# Altium PCB msxbreakout_fat.PcbDoc
Units mil, origin at the board's own origin, x right, y up, seen from the top; angles counter-clockwise.
Board outline 2561 x 2351 mil, 2 copper layers (Top Layer, Bottom Layer), stack 65.74 mil thick; 83 components, 142 nets, 380 pads, 236 vias.
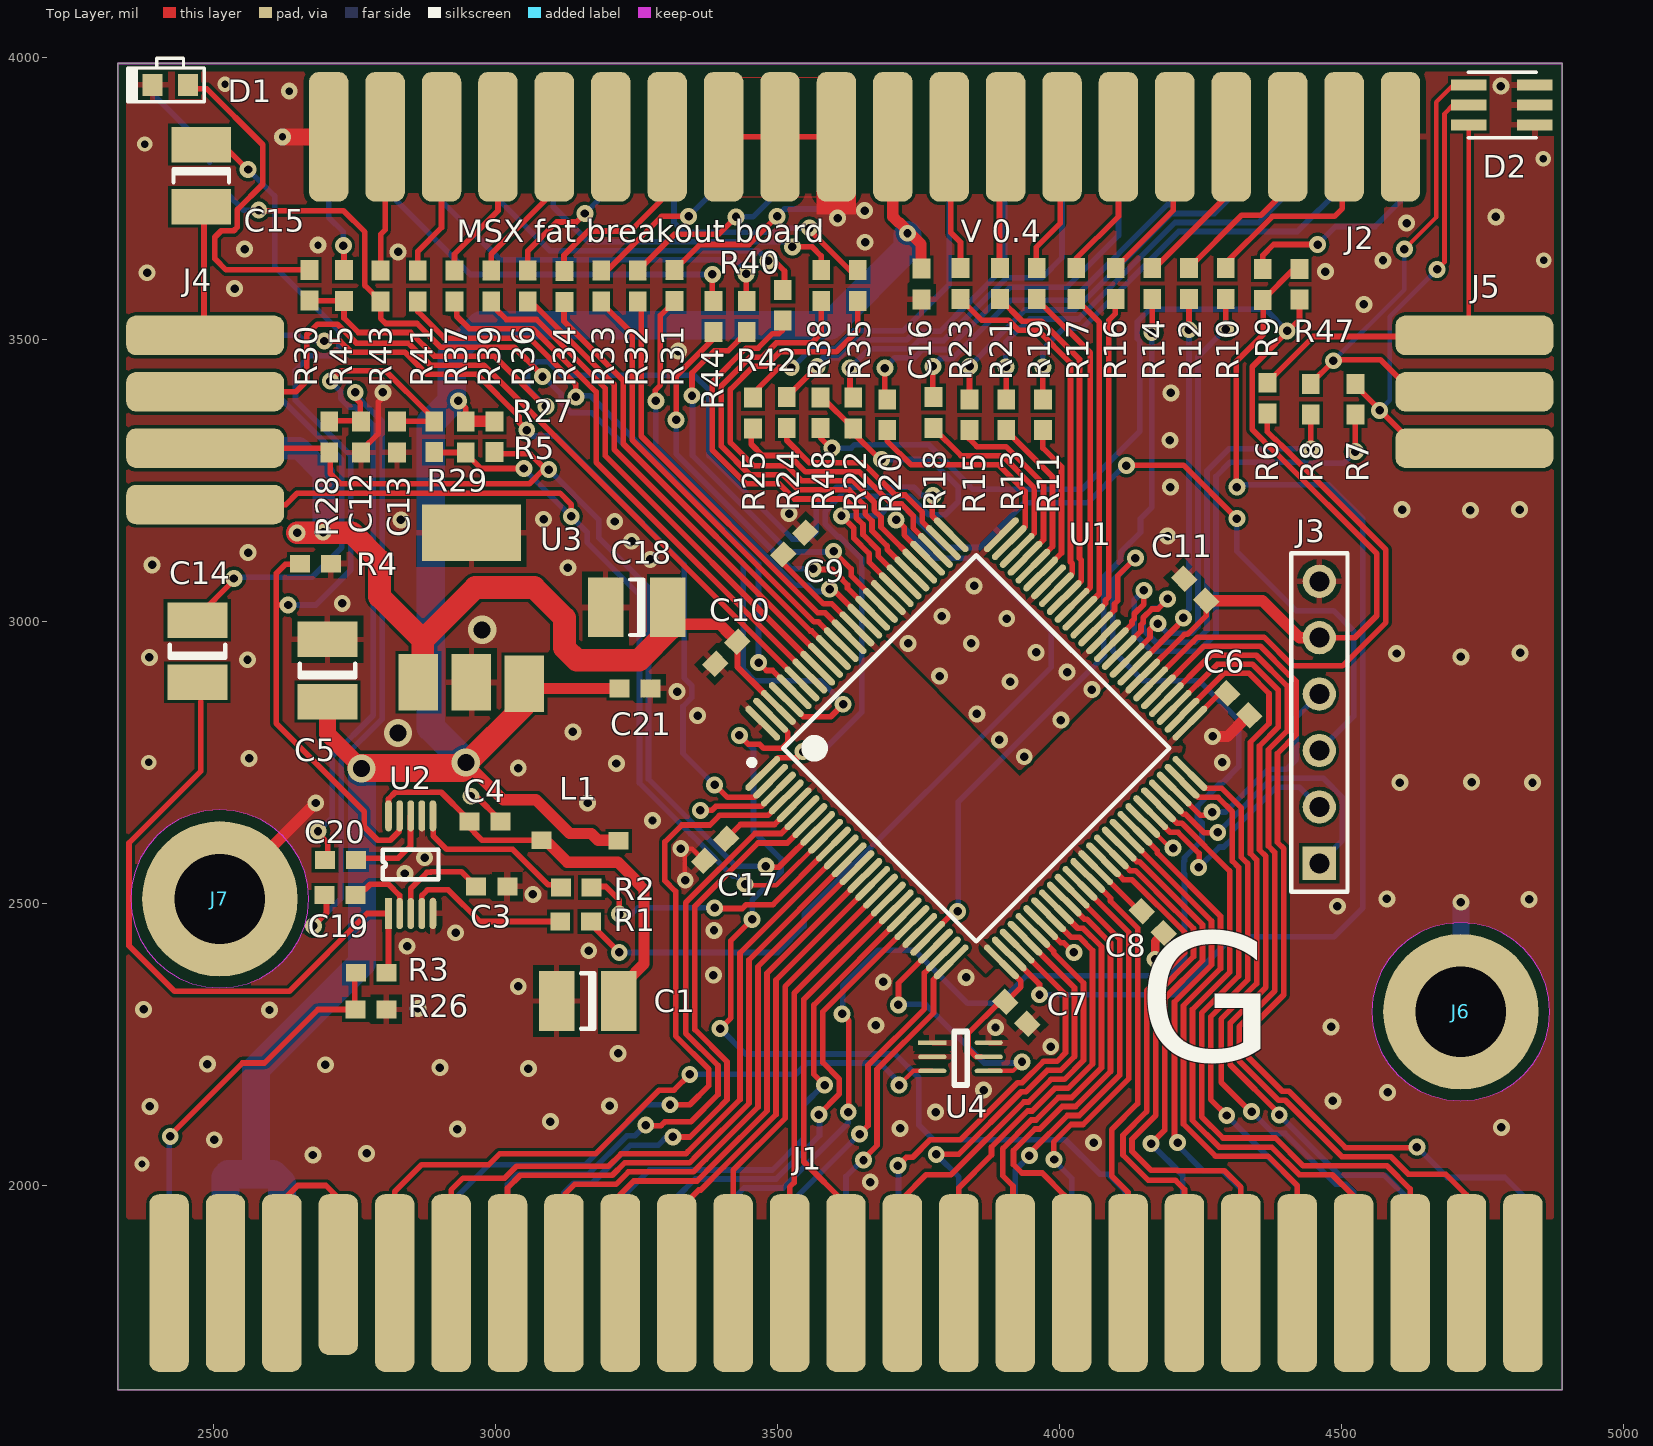
[diagram p0: Top Layer view]
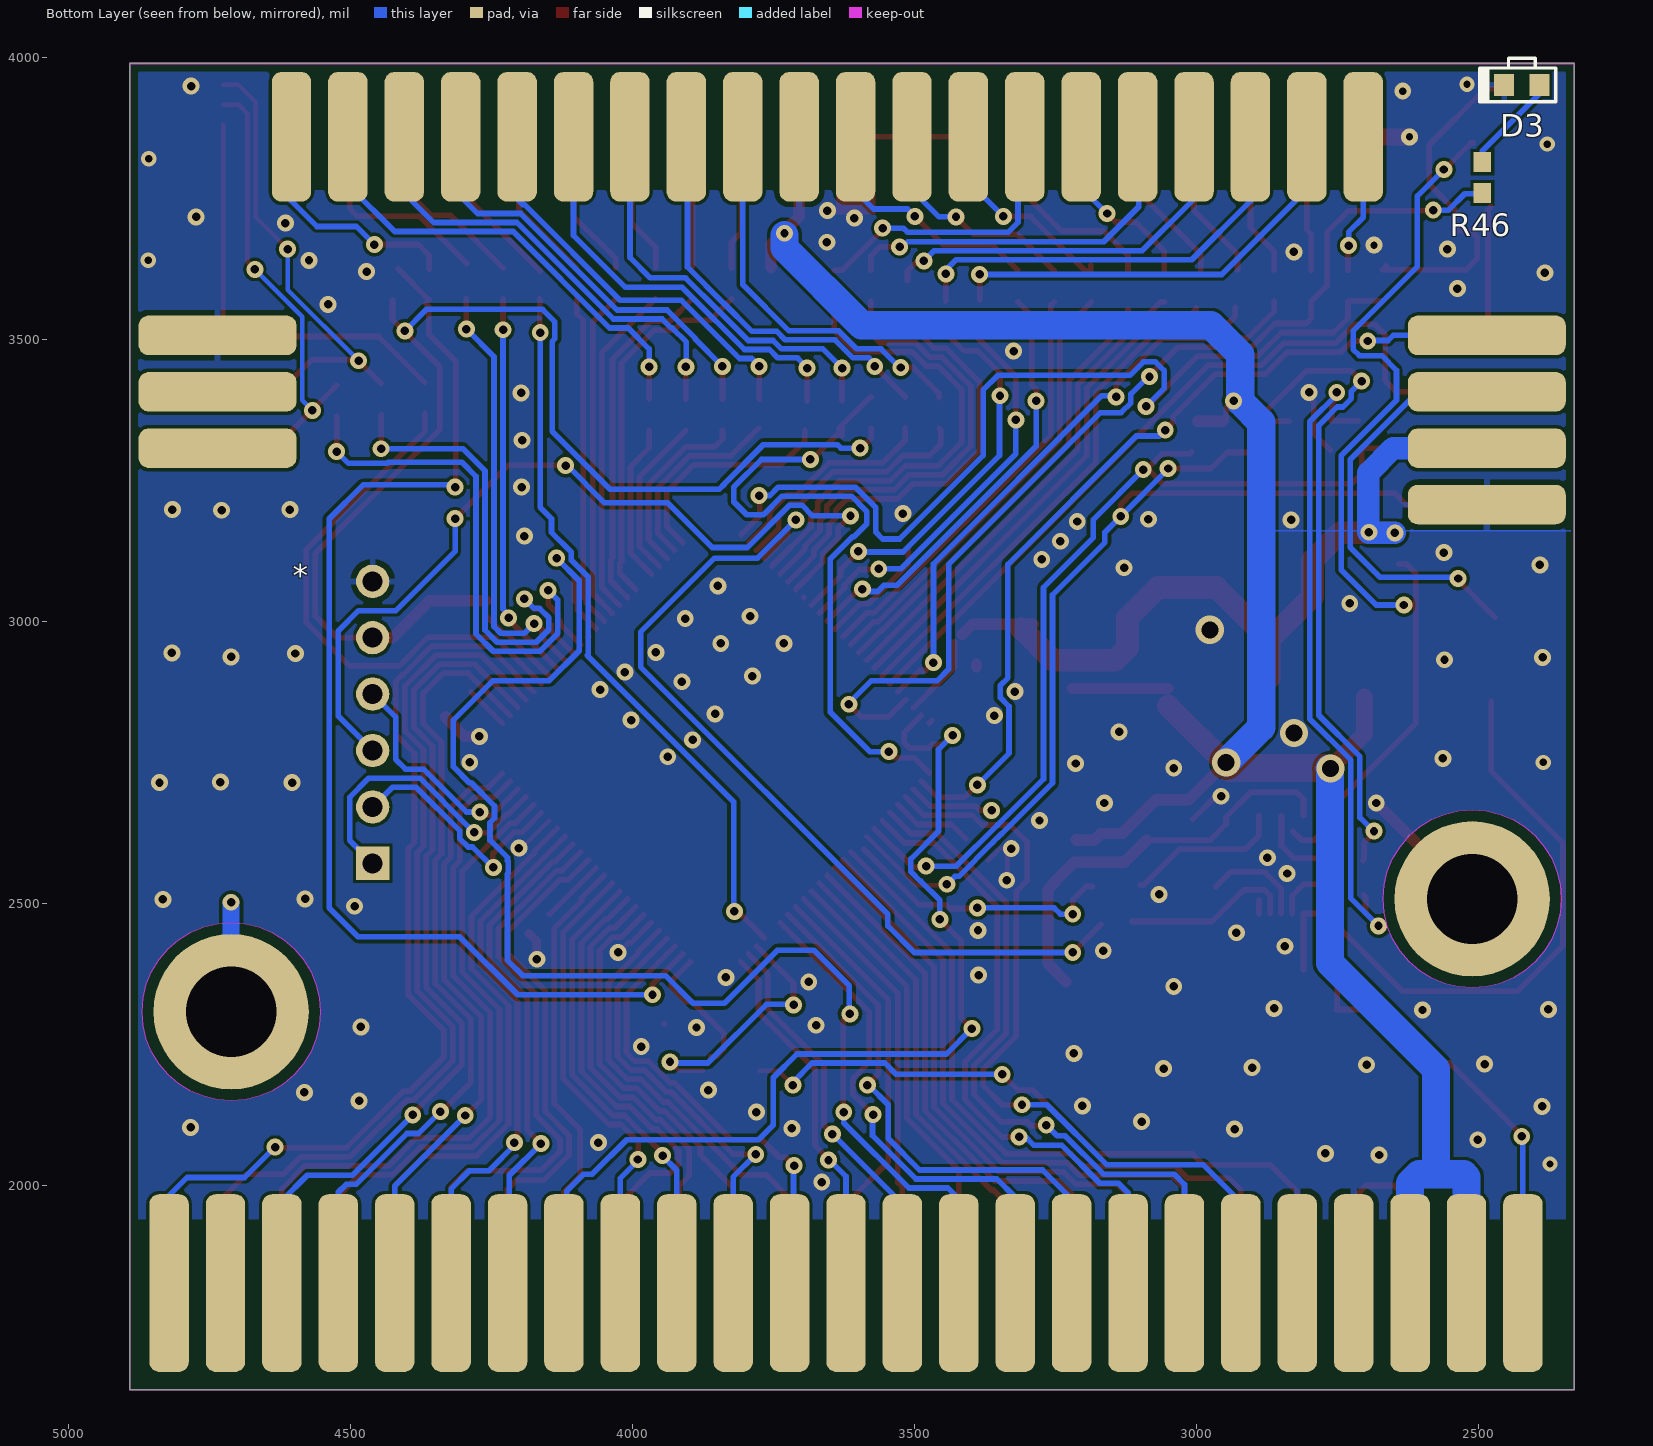
[diagram p1: Bottom Layer view, seen from below]
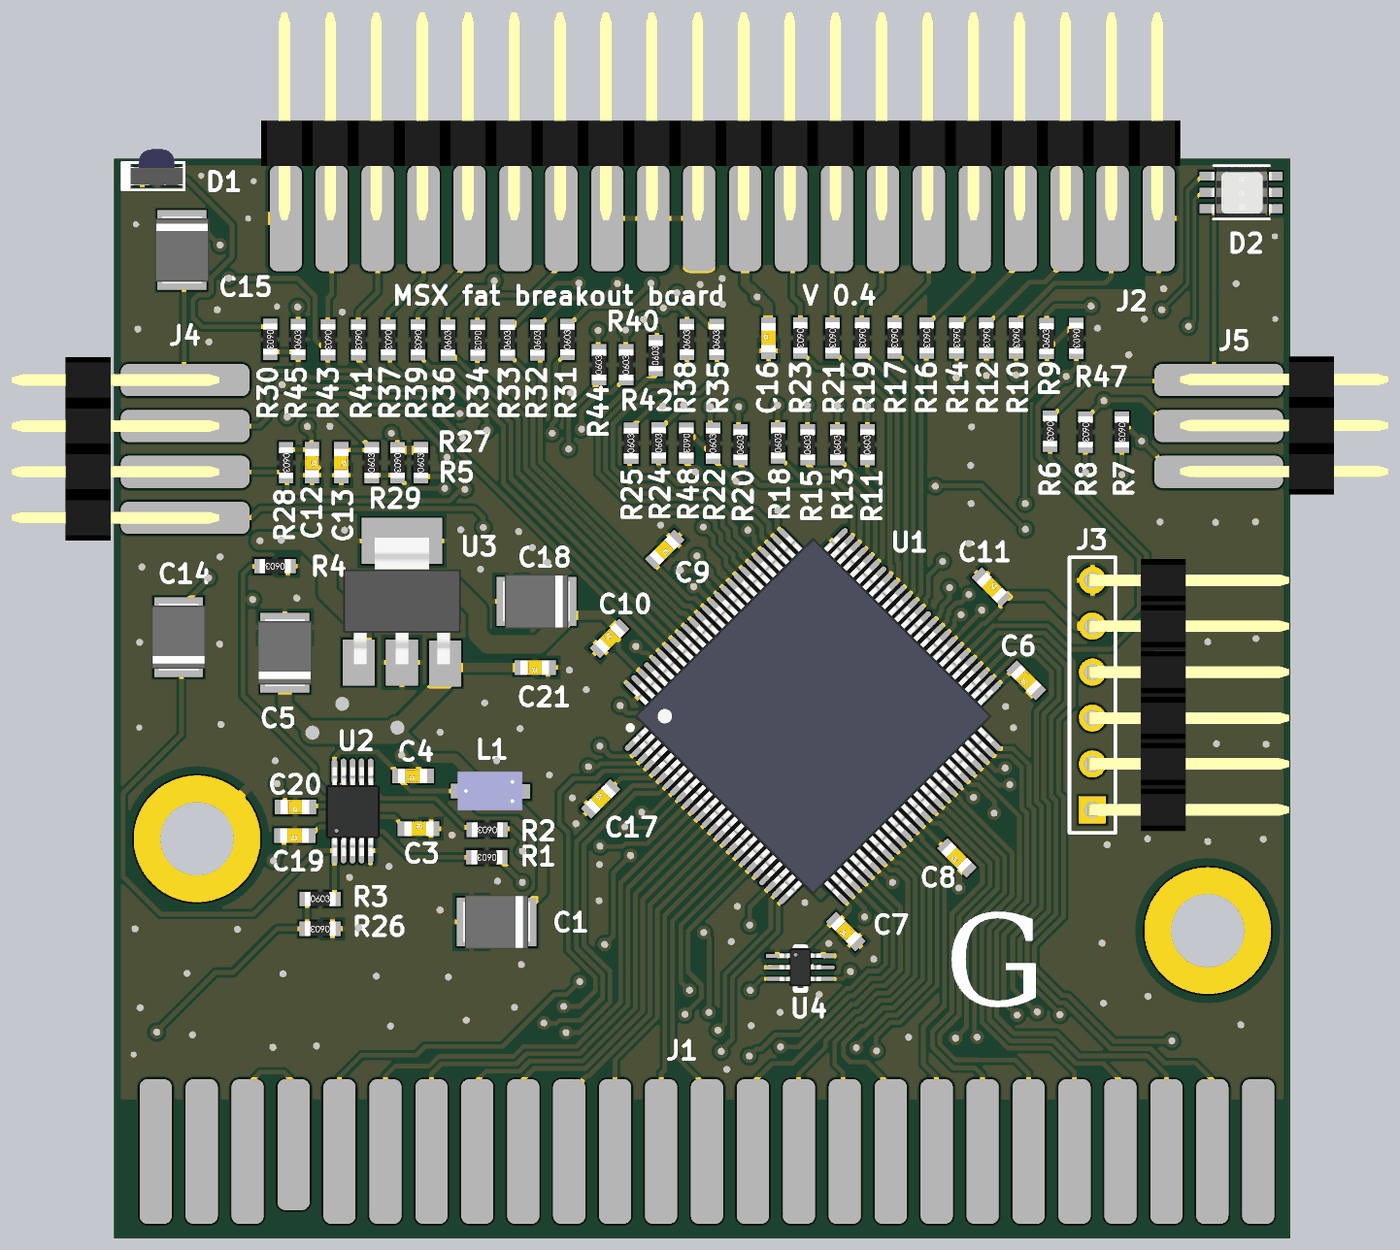
[diagram p2: 3D render of the assembled board from above, using the file's embedded part models]

## Layer stack, top to bottom
Top Solder: solder mask 0.4, Solder Resist, Dk 3.5
Top Layer: signal copper 1.37
Dielectric1: core 63, FR-4, Dk 4.2
Bottom Layer: signal copper 1.37
Bottom Solder: solder mask 0.4, Solder Resist, Dk 3.5

## Board outline
2331,1638 2331,3989 4892,3989 4892,1638

## Design rules (kind name [scope] priority, off if disabled: settings)
Clearance [All] p1: gap=6
HoleSize [All] p1: absolutevalues=TRUE maxlimit=200 minlimit=13 maxpercent=80.000 minpercent=20.000
MinimumAnnularRing [All] p1: minimumring=7
MinimumSolderMaskSliver [All] p1: minsoldermaskwidth=3
PlaneClearance [All] p1: clearance=8
PolygonConnect PolygonConnect_Pad [(InPadClass('All Pads'))] p1: connectstyle=Relief reliefconductorwidth=10 reliefentries=4 polygonreliefangle="90 Angle" airgapwidth=10
PolygonConnect [All] p2: connectstyle=Direct reliefconductorwidth=10 reliefentries=4 polygonreliefangle="90 Angle" airgapwidth=10
RoomDefinition msxbreakout_fat [InComponentClass('msxbreakout_fat')] p1: confinementstyle=ConfineIn formatcopy=TRUE lockcomponents=FALSE outline 2094,4326.29 2094,1621.47 2097.53,1618 5117,1618 5117,4333.22 5111.12,4339
RoutingVias [All] p1: holewidth=15 width=30 viastyle="Through Hole" minholewidth=13 minwidth=30 maxholewidth=50 maxwidth=50
SilkToSilkClearance [All] p1: silktosilkclearance=6
SilkToSolderMaskClearance SilkscreenOverComponentPads [IsPad] p1: minsilkscreentomaskgap=6 clearancetoexposedcopper=TRUE
SolderMaskExpansion [All] p1: expansion=4
UnpouredPolygon [All] p1: allowunpoured=FALSE
Width [All] p1: maxlimit=50 minlimit=8 preferedwidth=10
24 further rules are at their usual default settings.

## Components (designator, comment, footprint, x,y, rotation, side; value= is the part's Value field where it differs from the comment)
C1 "Cap Pol1" cap1210POL 3164,2327 r180 top
C3 "Cap" cap0603 2994,2530 r0 top
C4 "Cap" cap0603 2982,2645 r180 top
C5 "Cap Pol1" cap1210POL 2703,2913 r90 top
C6 "Cap" cap0603 4317,2853 r135 top
C7 "Cap" cap0603 3924,2306 r135 top
C8 "Cap" cap0603 4166,2467 r135 top
C9 "Cap" cap0603 3530,3138 r225 top
C10 "Cap" cap0603 3410,2944 r45 top
C11 "Cap" cap0603 4241,3056 r315 top
C12 "Cap" cap0603 2762,3327 r270 top
C13 "Cap" cap0603 2826,3327 r270 top
C14 "Cap Pol1" cap1210POL 2472,2947 r90 top
C15 "Cap Pol1" cap1210POL 2479,3790 r270 top
C16 "Cap" cap0603 3756,3598 r90 top
C17 "Cap" cap0603 3390,2595 r45 top
C18 "Cap Pol1" cap1210POL 3251,3025 r180 top
C19 "Cap" cap0603 2725,2515 r180 top
C20 "Cap" cap0603 2726,2577 r180 top
C21 "Cap" cap0603 3248,2881 r180 top
D1 "APA1606SURCK" LED-0603_LAMP_BLUE 2424,3951 r180 top
D2 "ASMT-YTC2-0AA02" ASMT-YTC2-0AA02 4843,3951 r0 top
D3 "APA1606SURCK" LED-0603_LAMP_RED 2424,3951 r0 bottom
J1 "msxcart" msxcart 2422,1777 r0 top
J2 "Header 20X2" HDR2X20_90 4605,3859 r180 top
J3 "Header 1X6" HDR1X6_90 4461,2571 r90 top
J4 "Header 10X2" HDR2X4_90 2486,3507 r270 top
J5 "Header 10X2" HDR2X3_90 4736,3307 r90 top
J6 "MountHole" MOUNTHOLE 4712,2308 r0 top
J7 "MountHole" MOUNTHOLE 2512,2508 r0 top
L1 "Inductor" ind1206 3150,2612 r0 top
R1 "Res1" res0603 3143,2468 r180 top
R2 "Res1" res0603 3144,2528 r180 top
R3 "Res1" res0603 2780,2377 r0 top
R4 "Res1" res0603 2682,3102 r180 top
R5 "Res1" res0603 2999,3327 r90 top
R6 "Res1" res0603 4369,3396 r270 top
R7 "Res1" res0603 4525,3394 r270 top
R8 "Res1" res0603 4446,3394 r270 top
R9 "Res1" res0603 4361,3597 r90 top
R10 "Res1" res0603 4295,3599 r270 top
R11 "Res1" res0603 3971,3366 r90 top
R12 "Res1" res0603 4230,3599 r270 top
R13 "Res1" res0603 3906,3366 r90 top
R14 "Res1" res0603 4165,3599 r270 top
R15 "Res1" res0603 3841,3366 r90 top
R16 "Res1" res0603 4100,3599 r270 top
R17 "Res1" res0603 4030,3599 r270 top
R18 "Res1" res0603 3777,3370 r90 top
R19 "Res1" res0603 3960,3599 r270 top
R20 "Res1" res0603 3695,3366 r90 top
R21 "Res1" res0603 3895,3599 r270 top
R22 "Res1" res0603 3635,3369 r90 top
R23 "Res1" res0603 3825,3599 r270 top
R24 "Res1" res0603 3517,3370 r90 top
R25 "Res1" res0603 3457,3369 r90 top
R26 "Res1" res0603 2780,2312 r180 top
R27 "Resistor" res0603 2948,3327 r270 top
R28 "Res1" res0603 2706,3327 r270 top
R29 "Resistor" res0603 2892,3327 r90 top
R30 "Res1" res0603 2671,3596 r270 top
R31 "Res1" res0603 3318,3595 r90 top
R32 "Res1" res0603 3253,3594 r90 top
R33 "Res1" res0603 3188,3594 r90 top
R34 "Res1" res0603 3123,3594 r270 top
R35 "Res1" res0603 3643,3595 r90 top
R36 "Res1" res0603 3058,3594 r90 top
R37 "Res1" res0603 2928,3595 r270 top
R38 "Res1" res0603 3578,3595 r90 top
R39 "Res1" res0603 2993,3595 r270 top
R40 "Res1" res0603 3510,3560 r90 top
R41 "Res1" res0603 2863,3595 r270 top
R42 "Res1" res0603 3446,3540 r90 top
R43 "Res1" res0603 2797,3595 r270 top
R44 "Res1" res0603 3387,3540 r90 top
R45 "Res1" res0603 2732,3595 r90 top
R46 "Res1" res0603 2494,3787 r270 bottom
R47 "Res1" res0603 4426,3598 r270 top
R48 "Res1" res0603 3577,3370 r270 top
U1 "XC95144XL-7TQ100C" TQ100_M 3853,2775 r45 top
U2 "LM4811MM" LM4811MM 2811,2482 r90 top
U3 "Regulator 3V3" sot223_4 2958,2892 r180 top
U4 "74LVC1G57" "SOT-363 PKG" 3550,2313 r0 top

## Footprints (in the part's own frame and the unit in brackets; to place one, negate y for a bottom-side part, rotate by r counter-clockwise, add the part's x,y. Pads: shape width x height; smd on the part's side, far side on the other; paste and mask are expansions set on the pad)
ASMT-YTC2-0AA02 [mm] "LED HIGH BRIGHTNESS RGB 6PLCC"
  rect 1.6x0.5 smd: 1(0,-1.8) 2(0,-0.9) 3(0,0) 4(-2.975,0) 5(-2.975,-0.9) 6(-2.975,-1.8)
  silkscreen extent -3,-2.37 0.08,0.58, body extent -3.15,-2.3 0.25,0.5, height 1.81
cap0603 [mm] "Capacitor 0603"
  rect 0.9x0.8 smd: 1(-0.7,0) 2(0.7,0)
  body extent -0.78,-0.4 0.83,0.4, height 0.3
cap1210POL [mm] "Mixxeo"
  rect 1.6x2.7 smd: 1(-1.4,0) 2(1.4,0)
  silkscreen extent -0.3,-1.25 0.3,1.25, body extent -1.85,-1.5 1.85,1.5, height 1.2
HDR1X6_90 [mm] "Connector; Header; 6 Position"
  rect 1.5x1.5 hole 0.9: 1(0,0)
  round 1.5 hole 0.9: 2(2.54,0) 3(5.08,0) 4(7.62,0) 5(10.16,0) 6(12.7,0)
  silkscreen extent -1.27,-1.27 13.97,1.27, body extent -1.17,-10.89 13.87,0.25, height 2.27
HDR2X3_90 [mil]
  rrect50% 70x280 smd far side: 1(200,0) 3(100,0) 5(0,0)
  rrect50% 70x280 smd: 2(200,0) 4(100,0) 6(0,0)
  body extent -49,-369 251,84, height 66
HDR2X4_90 [mil] "HDR2X4_90"
  rrect50% 70x280 smd far side: 1(300,0) 3(200,0) 5(100,0) 7(0,0)
  rrect50% 70x280 smd: 2(300,0) 4(200,0) 6(100,0) 8(0,0)
  body extent -50,-378 350,75, height 66
HDR2X20_90 [mil]
  rrect50% 70x230 smd far side: 1(0,0) 3(100,0) 5(200,0) 7(300,0) 9(400,0) 11(500,0) 13(600,0) 15(700,0) 17(800,0) 19(900,0) 21(1000,0) 23(1100,0) 25(1200,0) 27(1300,0) 29(1400,0) 31(1500,0) 33(1600,0) 35(1700,0) 37(1800,0) 39(1900,0)
  rrect50% 70x230 smd: 2(0,0) 4(100,0) 6(200,0) 8(300,0) 10(400,0) 12(500,0) 14(600,0) 16(700,0) 18(800,0) 20(900,0) 22(1000,0) 24(1100,0) 26(1200,0) 28(1300,0) 30(1400,0) 32(1500,0) 34(1600,0) 36(1700,0) 38(1800,0) 40(1900,0)
  body extent -47,-449 1953,4, height 66
ind1206 [mm]
  rect 0.9x0.8 smd: 1(-1.727,0) 2(1.753,-0.025)
  body extent -1.78,-1.08 1.78,1.08, height 1.51
LED-0603_LAMP_BLUE [mm]
  rect 0.9x1 smd: 1(-0.8,0) 2(0.8,0)
  silkscreen extent -1.52,-1.2 1.91,0.76, body extent -1.5,-1.5 1.5,0.5, height 1
LED-0603_LAMP_RED [mm]
  rect 0.9x1 smd: 1(-0.8,0) 2(0.8,0)
  silkscreen extent -1.52,-1.2 1.91,0.76, body extent -1.5,-1.5 1.5,0.5, height 1
LM4811MM [mm]
  rect 1.4x0.3 smd: 1(0,0)
  oval 1.4x0.3 smd: 2(0,-0.5) 3(0,-1) 4(0,-1.5) 5(0,-2) 6(4.4,-2) 7(4.4,-1.5) 8(4.4,-1) 9(4.4,-0.5) 10(4.4,0)
  silkscreen extent 1.53,-2.25 2.87,0.25, body extent -0.29,-2.52 4.61,0.48, height 1.15
MOUNTHOLE [mm]
  round 7 hole 4.064: 1(0,0)
  Keep-Out Layer pour cut-out: 4.012,0 3.963,0.628 3.816,1.24 3.575,1.822 3.246,2.358 2.837,2.837 2.358,3.246 1.822,3.575 1.24,3.816 0.628,3.963 0,4.012 -0.628,3.963 -1.24,3.816 -1.822,3.575 -2.358,3.246 -2.837,2.837 -3.246,2.358 -3.575,1.822 -3.816,1.24 -3.963,0.628 -4.012,0 -3.963,-0.628 -3.816,-1.24 -3.575,-1.822 -3.246,-2.358 -2.837,-2.837 -2.358,-3.246 -1.822,-3.575 -1.24,-3.816 -0.628,-3.963 0,-4.012 0.628,-3.963 1.24,-3.816 1.822,-3.575 2.358,-3.246 2.837,-2.837 3.246,-2.358 3.575,-1.822 3.816,-1.24 3.963,-0.628 4.012,0
msxcart [mil] "MSX cartridge"
  rrect50% 70x314.96 smd far side: 1(2400,50) 3(2300,50) 5(2200,50) 7(2100,50) 9(2000,50) 11(1900,50) 13(1800,50) 15(1700,50) 17(1600,50) 19(1500,50) 21(1400,50) 23(1300,50) 25(1200,50) 27(1100,50) 29(1000,50) 31(900,50) 33(800,50) 35(700,50) 37(600,50) 39(500,50) 41(400,50) 43(300,50) 45(200,50) 47(100,50) 49(0,50)
  rrect50% 70x314.96 smd: 2(2400,50) 4(2300,50) 6(2200,50) 8(2100,50) 10(2000,50) 12(1900,50) 14(1800,50) 16(1700,50) 18(1600,50) 20(1500,50) 22(1400,50) 24(1300,50) 26(1200,50) 28(1100,50) 30(1000,50) 32(900,50) 34(800,50) 36(700,50) 38(600,50) 40(500,50) 42(400,50) 46(200,50) 48(100,50) 50(0,50)
  rrect50% 70x285 smd: 44(300,65)
res0603 [mm]
  rect 0.9x0.8 smd: 1(-0.686,0) 2(0.7,0)
  body extent -0.85,-0.4 0.85,0.4, height 0.56
sot223_4 [mil]
  rect 70x100 smd: 1(-94,2.32) 2(0,0) 3(94,0)
  rect 175x100 smd: 2(0,-264.76)
  body extent -128,-272 128,4, height 65
"SOT-363 PKG" [mil]
  rect 50x8 smd: 1(225,-60)
  oval 50x8 smd: 2(225,-85) 3(225,-110) 4(325,-110) 5(325,-85) 6(325,-60)
  silkscreen extent 264,-135 287,-40, body extent 230,-126 320,-44, height 39
TQ100_M [mm] "100-Pin Thin Quad Flat Pack (TQ100), IPC Low Density"
  oval 2.1x0.3 smd: 1(-7.6,6) 2(-7.6,5.5) 3(-7.6,5) 4(-7.6,4.5) 5(-7.6,4) 6(-7.6,3.5) 7(-7.6,3) 8(-7.6,2.5) 9(-7.6,2) 10(-7.6,1.5) 11(-7.6,1) 12(-7.6,0.5) 13(-7.6,0) 14(-7.6,-0.5) 15(-7.6,-1) 16(-7.6,-1.5) 17(-7.6,-2) 18(-7.6,-2.5) 19(-7.6,-3) 20(-7.6,-3.5) 21(-7.6,-4) 22(-7.6,-4.5) 23(-7.6,-5) 24(-7.6,-5.5) 25(-7.6,-6) 51(7.6,-6) 52(7.6,-5.5) 53(7.6,-5) 54(7.6,-4.5) 55(7.6,-4) 56(7.6,-3.5) 57(7.6,-3) 58(7.6,-2.5) 59(7.6,-2) 60(7.6,-1.5) 61(7.6,-1) 62(7.6,-0.5) 63(7.6,0) 64(7.6,0.5) 65(7.6,1) 66(7.6,1.5) 67(7.6,2) 68(7.6,2.5) 69(7.6,3) 70(7.6,3.5) 71(7.6,4) 72(7.6,4.5) 73(7.6,5) 74(7.6,5.5) 75(7.6,6)
  oval 0.3x2.1 smd: 26(-6,-7.6) 27(-5.5,-7.6) 28(-5,-7.6) 29(-4.5,-7.6) 30(-4,-7.6) 31(-3.5,-7.6) 32(-3,-7.6) 33(-2.5,-7.6) 34(-2,-7.6) 35(-1.5,-7.6) 36(-1,-7.6) 37(-0.5,-7.6) 38(0,-7.6) 39(0.5,-7.6) 40(1,-7.6) 41(1.5,-7.6) 42(2,-7.6) 43(2.5,-7.6) 44(3,-7.6) 45(3.5,-7.6) 46(4,-7.6) 47(4.5,-7.6) 48(5,-7.6) 49(5.5,-7.6) 50(6,-7.6) 76(6,7.6) 77(5.5,7.6) 78(5,7.6) 79(4.5,7.6) 80(4,7.6) 81(3.5,7.6) 82(3,7.6) 83(2.5,7.6) 84(2,7.6) 85(1.5,7.6) 86(1,7.6) 87(0.5,7.6) 88(0,7.6) 89(-0.5,7.6) 90(-1,7.6) 91(-1.5,7.6) 92(-2,7.6) 93(-2.5,7.6) 94(-3,7.6) 95(-3.5,7.6) 96(-4,7.6) 97(-4.5,7.6) 98(-5,7.6) 99(-5.5,7.6) 100(-6,7.6)
  silkscreen extent -7.72,-6.15 6.15,6.82, body extent -8,-8 8,8, height 1.63

## Part data
C1 C5 C14 C15 C18: "Polarized Capacitor"
C3 C4 C6 C7 C8 C9 C10 C11 C12 C13 C16 C17 C19 C20 C21: "Capacitor"
D1 D3: "1.6x0.6mm RIGHT ANGLE SMD CHIP LED LAMP, Hyper Red"
D2: "Typical RED, GREEN, YELLOW, AMBER GaAs LED"
J2: "Header, 40-Pin, Dual row"
J3: "Header, 6-Pin, Single row"
J4: library part "Header 4X2", "Header, 8 -Pin, Dual row"
J5: library part "Header 3X2", "Header, 10-Pin, Dual row"
J6 J7: "Mounting hole"
R1 R2 R3 R4 R5 R6 R7 R8 R9 R10 R11 R12 R13 R14 R15 R16 R17 R18 R19 R20 R21 R22 R23 R24 R25 R26 R28 R30 R31 R32 R33 R34 R35 R36 R37 R38 R39 R40 R41 R42 R43 R44 R45 R46 R47 R48: "Resistor"
U1: "FastFLASH XC900XL, 3.3V High-Performance 144 Macrocell CPLD, 81 User I/Os, 100-Pin TQFP, Speed Grade 7, Commercial Grade"

## Via types
v1: diameter 30, hole 15, Top Layer to Bottom Layer, tented both sides, 223 vias
v2: diameter 27, hole 13, Top Layer to Bottom Layer, tented both sides, 6 vias
v3: diameter 50, hole 30, Top Layer to Bottom Layer, tented both sides, 4 vias
v4: diameter 30, hole 13, Top Layer to Bottom Layer, tented both sides, 3 vias

## Nets (pads, with @x,y where several pads share a name; then routed paths per layer and width w, separated by ;. In a path a pad name is that pad's centre, name@x,y a point inside that pad or via, vN(x,y) a via of type N, cw(c..) or ccw(c..) an arc to the next point about the centre after c; other vN are vias at no path point)
+3V3: C6.2 C7.2 C8.2 C9.2 C10.2 C11.2 C17.2 C18.1 J3.5 J4.3 R47.2 R48.2 U1.5 U1.26 U1.38 U1.51 U1.57 U1.88 U1.98 U3.3 U4.5 | length 4806
  Top Layer w10: C17.2 3435,2640 3495.29,2640 U1.5 ; U1.98@3476,2873 3501.62,2847.38 U1.98 ; C9.2@3511.51,3127.51 3511.51,3101.72 3582.23,3031 3597,3031 U1.88 ; R48.2 3577,3325 3597,3305 v1(3597,3307) ; U4.5@3862,2228 3853,2228 3839,2242 3839,2270 3894.49,2325.49 C7.2 ; U1.26 3932,2361.93 3932,2352 C7.2@3905.49,2325.49 ; U1.38 C8.2@4147.5,2480.5 ; U1.57 4222.03,2977 4227.24,2977 4230.24,2980 4230.77,2980 4260.49,3009.72 C11.2 ; U1.51 C6.2@4287,2875 ; R47.2 4426,3535 4342.25,3451.25 4342.25,3340.12 4385.37,3297 4386.37,3297 4563,3120.37 4563,3010 4524,2971 J3.5
  Top Layer w11: C10.2 3429.49,2919.51 U1.98@3476,2873
  Top Layer w20: C18.1@3290,2995 3397.97,2995 3416,2976.97 ; C11.2 4360.51,3036.51 4426.03,2971 J3.5
  Top Layer w40: v1(2649,3157) 2746,3157 2795,3108 2795,3044 2872,2967 ; U3.3@2872,2900 2872,2967 ; C18.1@3311,2987 3255,2931 3145,2931 3123,2953 3123,3006 3069,3060 2965,3060 2872,2967
  Bottom Layer w10: v1@3597,3302 v1(3597,3307) 3631,3307 3637,3313 3768.63,3313 3837,3244.63 3837,3244 3847,3234 4040,3234 4143,3337 4143,3496.23 4138,3501.23 4138,3531 4160,3553 4366,3553 v1(4404,3515)
  Bottom Layer w40: J4.3@2497,3307 2652,3307 2696,3263 v1@2696,3158 ; v1(2649,3157) v1@2695,3157
  other v1: 2695,3158
+5V: C5.1 C16.2 C21.2 J1.45 J1.47 J2.20 L1.2 R5.2 R27.1 U3.1 | length 4264.3
  Top Layer w10: v1(2935,3391) 2948,3378 R27.1
  Top Layer w20: v3(2948,2750) 2949.5,2748.5 3014.25,2683.75 3072.55,2683.75 3132.3,2624 3170.3,2624 3182.3,2612 3213,2612 L1.2@3214,2613 ; R27.1@2955,3354.56 R5.2 ; U3.1@3051,2881 C21.2 ; J2.20@3705,3862 3705,3717.2 3715,3707.2 3716.8,3707.2 3755,3669 C16.2@3755,3626.56
  Top Layer w30: C5.1@2703,2866 2703,2800 v3@2763,2740
  Top Layer w40: v3@2941,2740 2949.5,2748.5 U3.1@3051,2850
  Top Layer w50: v3@2763,2740 v3@2941,2740
  Bottom Layer w50: J1.47 2522,2015 2527,2020 2606,2020 2622,2004 J1.45 ; 2576,2020 2576,2206.2 2764,2394.2 2764,2738 v3@2765,2739 ; v1@2923,3390 2886,3353 2886,2812 v3(2948,2750) ; v1@2923,3391 2923,3473 2975,3525 3594,3525 3731,3662 v1@3731,3685
  other v1: 3731,3688
  other v3: 2763,2739
CT_A0: J1.28 U1.17 | length 753.3
  Top Layer w10: J1.28 3522,1997 3530,2005 3530,2340.64 U1.17
CT_A1: J1.27 U1.24 | length 696.2
  Top Layer w10: v1(3646,2091) 3661,2106 3661,2213 3761,2313 3761,2376.77 U1.24
  Bottom Layer w10: J1.27 3522,1967 v1(3646,2091)
CT_A2: J1.30 U1.16 | length 802.9
  Top Layer w10: J1.30 3422,2027 3514,2119 3514,2352.48 U1.16
CT_A3: J1.29 U1.63 | length 2449.6
  Top Layer w10: v1(3615,2304) 3627,2292 3627,2135 v1@3621,2129 ; U1.63 4098,3020 4098,3030.75 4104,3036.75 4104,3081 v1(4135,3112)
  Bottom Layer w10: J1.29 3422,1976 3441.48,1995.48 3510.48,1995.48 3626,2111 3626,2122 v1@3619,2129 ; v1(3615,2304) 3615,2306 3616,2307 3616,2354 3679,2417 3743.63,2417 3837.63,2323 3893,2323 3942,2372 4195,2372 4222,2399 4222,2552.23 4221,2553.23 4221,2574.77 4222,2575.77 4222,2581.23 4253,2612.23 4253,2643.23 4245,2651.23 4245,2672.77 4286.23,2714 4289.77,2714 4318,2742.23 4318,2825 4248,2895 4148,2895 4095,2948 4095,3072 v1(4135,3112)
  other v1: 3626,2130
CT_A4: J1.32 U1.15 | length 854.4
  Top Layer w10: J1.32 3322,1953 3361,1992 3364.39,1992 3406,2033.61 ; 3406,2033.63 3498,2125.63 3498,2364.32 U1.15
CT_A5: J1.31 U1.20 | length 920.6
  Top Layer w10: v1(3574,2125.63) 3574,2126 3610,2162 3610,2188.77 3581,2217.77 3581,2308.13 U1.20
  Bottom Layer w10: J1.31 3322,1979 3354.48,2011.48 3498.11,2011.48 3575,2088.37 3575,2124.63 v1(3574,2125.63)
CT_A6: J1.22 U1.32 | length 810.6
  Top Layer w10: J1.22 3822,1996 3880,2054 3880,2068.12 3943.88,2132 3952.12,2132 3992.12,2172 4015.65,2172 4059,2215.35 4059,2416.77 4035.77,2440 4020.97,2440 U1.32
CT_A7: J1.21 U1.29 | length 807.4
  Top Layer w10: v1(3782,2055) 3821.63,2055 3932.63,2166 3940.86,2166 3978.86,2204 4002.4,2204 4027,2228.6 4027,2350.45 U1.29
  Bottom Layer w10: v1(3782,2055) 3822,2015 J1.21
CT_A8: J1.24 U1.30 | length 839.8
  Top Layer w10: J1.24 3722,1977 3764,2019 3808.25,2019 3937.25,2148 3945.49,2148 3985.49,2188 4009.02,2188 4043,2221.98 4043,2359 3990,2412 3990,2415.29 U1.30
CT_A9: J1.17 U1.36 | length 824.5
  Top Layer w10: v1(3991,2046) 3990,2047 3990,2077 4021,2108 4042.16,2108 4123,2188.84 4123,2449 4036.74,2535.26 U1.36
  Bottom Layer w10: v1@3990,2045 4022,2013 J1.17
CT_A10: J1.20 U1.33 | length 800.1
  Top Layer w10: J1.20@3918,1831 3918,1999 3900,2017 3900,2065.49 3950.51,2116 3958.75,2116 3998.75,2156 4022.28,2156 4075,2208.72 4075,2423.4 4042.4,2456 4032.81,2456 U1.33
CT_A11: J1.19 U1.35 | length 820.9
  Top Layer w10: v1@3953,2054 3953,2062.63 4014.37,2124 4035.53,2124 4107,2195.47 4107,2436.65 4022.82,2520.83 U1.35
  Bottom Layer w10: J1.19 3922,2027 3949,2054 v1@3953,2054
  other v1: 3947,2053
CT_A12: J1.23 U1.28 | length 815.3
  Top Layer w10: v1(3714,2035) 3729,2050 3740.23,2050 3771.23,2081 3825,2081 3926,2182 3934.24,2182 3972.24,2220 3995.77,2220 4011,2235.23 4011,2338.61 U1.28
  Bottom Layer w10: v1@3715,2035 3715,1834 J1.23
CT_A13: J1.26 U1.18 | length 765.8
  Top Layer w10: J1.26 3622,1967 3547,2042 3547,2329.81 U1.18
CT_A14: J1.25 U1.25 | length 646.6
  Top Layer w10: v1@3652,2046 3677,2071 3677,2206 3777,2306 3777,2364.93 U1.25
  Bottom Layer w10: J1.25 3622,2016 v1@3652,2046
  other v1: 3653,2045
CT_A15: J1.18 U1.34 | length 710.3
  Top Layer w10: U1.34 4044.64,2472 4049.02,2472 4091,2430.02 4091,2202.09 4028.91,2140 4005.37,2140 3965.37,2100 3957.14,2100 3919,2061.86 3919,2037 3934,2022 3970,2022 J1.18@4009.5,1982.5
CT_BUSDIR: J1.10 U1.43 | length 1034.1
  Top Layer w10: U1.43 4174,2593.19 4174,2589.23 4286,2477.23 4286,2384.37 4220.35,2318.72 4220.35,2108.65 4277,2052 4370,2052 4422,2000 J1.10
CT_CLOCK: J1.42 U4.3 | length 1229.9
  Top Layer w8: v1(3716,2178) 3741,2203 U4.3
  Top Layer w10: J1.42 2822,1989 2870,2037 2989,2037 3008,2056 3178,2056 3291,2169 3317,2169 v1(3345,2197)
  Bottom Layer w10: v1@3354,2197 3533,2197 3553,2217 3682,2217 3716,2183 v1(3716,2178)
CT_CS1\: J1.1 U1.55 | length 1758.6
  Top Layer w10: U1.55 4256.71,2956 4356.37,2956 4407.37,2905 4409,2905 4420,2894 4420,2799 4387,2766 4387,2608.16 4398,2597.16 4398,2337.98 4335.07,2275.05 4335.07,2227.19 4395.25,2167 4407.4,2167 4507.4,2067 4633,2067 v1(4634,2068)
  Bottom Layer w10: v1(4634,2068) 4688,2014 4790,2014 4822,1982 J1.1
CT_CS2\: J1.2
CT_CS12\: J1.3
CT_D0: J1.34 U1.14 | length 810.3
  Top Layer w10: J1.34@3222,1984.37 3245.63,2008 3357.76,2008 3390,2040.24 3482,2132.25 3482,2376.16 U1.14
CT_D1: J1.33 U1.19 | length 1005.8
  Top Layer w10: v1(3584,2178) 3565,2197 3565,2319.97 U1.19
  Bottom Layer w10: J1.33 3222,1976 3273.48,2027.48 3491.48,2027.48 3547,2083 3547,2143 3582,2178 v1(3584,2178)
CT_D2: J1.36 U1.13 | length 903
  Top Layer w10: 3124,1985 3141,2002 3214.25,2002 3236.25,2024 3351.14,2024 3374,2046.86 ; 3374,2046.88 3466,2138.88 3466,2388 U1.13
CT_D3: J1.35 U1.7 | length 1142.8
  Top Layer w10: v1(3315,2086) 3345.24,2086 3403,2143.76 3403,2144 3411,2152 3411,2219.25 3354,2276.25 3354,2495 3466,2607 3517.97,2607 U1.7
  Bottom Layer w10: J1.35 3122,1987 3139,2004 3172.25,2004 3239.25,2071 3289,2071 v1@3306,2088
CT_D4: J1.38 U1.12 | length 1163.9
  Top Layer w10: J1.38 3022,1995.37 3044.63,2018 3207.63,2018 3229.63,2040 3344.51,2040 3358,2053.49 3450,2145.51 3450,2399.84 U1.12
CT_D5: J1.37 U1.6 | length 1257.9
  Top Layer w10: v1(3267,2107) v1@3273,2113 ; v1@3268,2106 3294,2106 3301,2113 3347,2113 3395,2161 3395,2212.63 3338,2269.63 3338,2501.63 3460.37,2624 3507.13,2624 U1.6
  Bottom Layer w10: J1.37 3022,2002 3040,2020 3165.63,2020 3233.63,2088 3248,2088 v1(3267,2107)
CT_D6: J1.40 U1.11 | length 1266.9
  Top Layer w10: J1.40@2929,1834 J1.40 2922,1992 2943,2013 3017,2013 3038,2034 3201,2034 3223,2056 3337.88,2056 3342,2060.12 ; 3342,2060.14 3434,2152.14 3434,2412 3613.26,2591.26 U1.11
CT_D7: J1.39 U1.4 | length 1396.2
  Top Layer w10: v1(3310,2143) 3345,2143 3379,2177 3379,2206 3320,2265 3320,2521.23 3301,2540.23 3301,2609 3331,2639 3380.63,2639 3397.63,2656 3483.45,2656 U1.4
  Bottom Layer w10: J1.39 2922,1970 2989,2037 3160,2037 3266,2143 v1@3308,2143
CT_INT\: J1.8 U1.46 | length 1139.3
  Top Layer w10: U1.46 4208.71,2642 4217.4,2642 4302,2557.4 4302,2377.75 4236.35,2312.09 4236.35,2115.28 4283.63,2068 4376.63,2068 4425.63,2019 4484,2019 4522,1981 J1.8
CT_IOREQ\: J1.11 U1.42 | length 950.6
  Top Layer w10: U1.42 4120.25,2618.63 4270,2468.88 4270,2391 4204.35,2325.35 4204.35,2076.65 v1@4206,2075
  Bottom Layer w10: v1@4206,2075 4255,2026 4290,2026 4322,1994 J1.11
  other v1: 4210,2076
CT_M1\: J1.9 U1.50 | length 1054.5
  Top Layer w10: U1.50 4258.07,2704 4288.4,2704 4323,2669.4 4323,2581.65 4334,2570.65 4334,2364.49 4268.35,2298.84 4268.35,2152.65 v1(4297,2124)
  Bottom Layer w10: v1(4297,2124) 4422,1999 J1.9
CT_MREQ\: J1.12 U1.40 | length 1031.6
  Top Layer w10: U1.40@4092.74,2591.26 U1.40 4125.53,2558.15 4135.3,2558.15 4206.63,2486.83 4206.8,2486.83 4238,2455.63 4238,2405.6 4171,2338.6 4171,2124 4129,2082 4129,2060.63 4162.63,2027 4208.63,2027 4209.63,2026 4293,2026 4322,1997 J1.12
CT_RD\: J1.14 U1.39 | length 936.9
  Top Layer w10: U1.39 4113.69,2542.15 4128.68,2542.15 4221.83,2449 ; J1.14 4222,1993 4206,2009 4158,2009 4113,2054 4113,2089 4155,2131 4155,2345.23 4222,2412.23 4222,2449
CT_RESERV1: J1.5 U1.53 | length 1512.5
  Top Layer w10: U1.53 4280.39,2924 4342.75,2924 4388,2878.75 4388,2812.25 4355,2779.25 4355,2594.91 4366,2583.91 4366,2351.24 4303.07,2288.3 4303.07,2213.93 4392,2125 v1(4390,2125)
  Bottom Layer w10: v1(4390,2125) 4497,2018 4577,2018 4622,1973 J1.5
CT_RESERV2: J1.16 U1.37 | length 790.2
  Top Layer w10: U1.37 4090.85,2509.31 4090.85,2504.32 4139,2456.17 4139,2145 4093,2099 4093,2017 4122,1988 J1.16
CT_RESET\: J1.15 U1.99 | length 1905.8
  Top Layer w10: v1(3399,2278) 3418,2297 3418,2434 v1(3455.5,2471.5) ; v1(3433,2798) 3449,2782 3469,2782 3476,2775 3509,2775 3518.77,2784.77 3518.77,2803 U1.99
  Bottom Layer w10: v1(3399,2278) 3444,2233 3709,2233 3751,2191 3751,2107 3777,2081 4010.77,2081 4071.77,2020 4087,2020 4117,1990 4117,1832 J1.15 J1.15@4122,1924.79 ; v1(3433,2798) 3458,2773 3458,2628 3507,2579 3507,2556.23 3490.77,2540 3490,2540 3455.5,2505.5 v1(3455.5,2471.5)
CT_RFSH\: J1.6 U1.49 | length 1273.5
  Top Layer w10: U1.49 4246.23,2688 4281.77,2688 4306.77,2663 4306.77,2637 ; 4307,2636.77 4307,2575.02 4318,2564.02 4318,2371.12 4252.35,2305.47 4252.35,2121.91 4290.25,2084 4383.25,2084 4432.25,2035 4581,2035 4622,1994 J1.6
CT_SLTSL\: J1.4 U1.54 | length 1635.8
  Top Layer w10: U1.54 4268.55,2940 4349.37,2940 4404,2885.37 4404,2805.63 4371,2772.63 4371,2601.53 4382,2590.53 4382,2344.61 4319.07,2281.68 4319.07,2220.56 4388.63,2151 4400.77,2151 4500.77,2051 4587.63,2051 4618.63,2020 4685,2020 4722,1983 J1.4
CT_WAIT\: J1.7 U1.52 | length 1413
  Top Layer w10: U1.52 4292.23,2908 4336.12,2908 4372,2872.12 4372,2818.88 4339,2785.88 4339,2588.28 4350,2577.28 4350,2357.86 4287.07,2294.93 4287.07,2182.93 4341,2129 v1(4341,2131)
  Bottom Layer w10: v1(4341,2131) 4380,2092 4400.37,2092 4490.37,2002 4508,2002 4522,1988 J1.7
CT_WR\: J1.13 U1.41 | length 904.3
  Top Layer w10: U1.41 4137.37,2574.15 4141.93,2574.15 4213.25,2502.83 4213.43,2502.83 4254,2462.25 4254,2398.98 4187,2331.98 4187,2098 v1(4163,2074)
  Bottom Layer w10: v1(4163,2074) 4219,2018 4219,1830 J1.13
E1: R9.1 R47.1 U1.27 | length 2091.7
  Top Layer w10: U1.27 3965,2356.77 v1(3965,2338) ; v1(4315,3238) 4314,3239 4314,3461 4362,3509 4362,3558.44 R9.1@4367,3563.44 ; R9.1 R47.1@4416,3625
  Bottom Layer w10: v1(3965,2338) 4204,2338 4307,2441 4487,2441 4538,2492 4538,3182 4478,3242 v1@4318,3242
E2: R11.1 U1.70 | length 283.4
  Top Layer w10: U1.70 3967.14,3084.14 4004,3121 4004,3274 3971,3307 R11.1@3971,3338.44
E3: R10.2 U1.59 | length 773.9
  Top Layer w10: U1.59 4161,2971.64 4161,2986 4171,2996 v1(4175,2996) ; v1(4295,3518) R10.2
  Bottom Layer w10: v1(4175,2996) 4192,2979 4234,2979 4246,2991 4246,3469 v1(4295,3518)
E4: R13.1 U1.71 | length 288.9
  Top Layer w10: R13.1@3906,3338.44 3988,3256.44 3988,3132.71 U1.71
E5: R12.2 U1.58 | length 682.5
  Top Layer w10: U1.58 4180,2962.81 4180,2963 4210,2993 ; v1(4230,3517) R12.2
  Bottom Layer w10: v1@4217,3006 4214,3006 4230,3022 v1(4230,3517)
  other v1: 4220,3006
E6: R15.1 U1.72 | length 324.4
  Top Layer w10: R15.1@3841,3338.44 3841,3323 3854.28,3309.72 3905.53,3309.72 3972,3243.25 3972,3144.55 U1.72
E7: R14.2 U1.22 | length 1306.3
  Top Layer w10: U1.22 3814.55,2486 v1(3820,2486) ; v1(4164,3512) 4165,3513 R14.2 R14.2@4164,3570.44
  Bottom Layer w10: v1(3820,2486) 3821,2485 3821,2680 4080.69,2939.69 4079,2941.37 4079,3078.63 4109,3108.63 4109,3122.77 4144,3157.77 4144,3182 4164,3202 v1(4164,3512)
E8: R18.1 U1.73 | length 346
  Top Layer w10: R18.1@3777,3342.44 3825.72,3293.72 3898.9,3293.72 3955.5,3237.12 3955.5,3155.89 U1.73
E9: R16.2 U1.64 | length 590
  Top Layer w10: U1.64 4082,3031.84 4082,3037.37 4088,3043.37 4088,3534 4099,3545 R16.2@4099,3570.44
E10: R20.1 U1.74 | length 425.7
  Top Layer w10: R20.1@3695,3338.44 3695,3320 3737.28,3277.72 3892.28,3277.72 3939.5,3230.5 3939.5,3167.73 U1.74 3911.69,3139.69 U1.74@3928,3156
E11: R17.2 U1.65 | length 588.2
  Top Layer w10: R17.2 4071,3530.44 4071,3293.02 4071.02,3049.02 4036.74,3014.74 U1.65
E12: R22.1 R48.1 U1.1 | length 1229.5
  Top Layer w10: U1.1 3474.39,2731.39 3501.5,2758.5 3536.5,2758.5 3546,2768 v1(3546,2769) ; R48.1 3580,3397 R22.1 ; R22.1@3629,3329 R22.1@3629,3343 ; R22.1@3631,3338 3683,3286 3684,3286 v1(3685,3287)
  Bottom Layer w10: v1(3546,2769) 3580,2769 3650,2839 3650,3110.77 3610.77,3150 3608,3150 3585,3173 3585,3194.37 3588,3197.37 3588,3197.77 3612.23,3222 3735.37,3222 3768.37,3189 3798,3189 3821,3212 3821,3238 3772,3287 v1(3685,3287)
E13: R19.2 U1.66 | length 596.1
  Top Layer w10: R19.2 4055,3476.44 4055,3286.39 ; U1.66 4023.33,3028.33 4055.02,3060.02 4055.02,3286.37
E14: R24.1 U1.77 | length 384.5
  Top Layer w10: R24.1 3517,3321 3557,3281 3652.37,3281 3709.37,3224 3726.91,3224 3757,3193.91 3757,3177 3794.31,3139.69 U1.77
E15: R21.2 U1.67 | length 621.6
  Top Layer w10: R21.2 3934.44,3532 3968.69,3532 4036,3464.69 4036,3111.8 4039.02,3108.78 4039.02,3072.02 4009.25,3042.25 U1.67
E16: R25.1 U1.78 | length 446.7
  Top Layer w10: R25.1 3454,3339 3454,3314 3474,3294 3521.37,3294 3550.37,3265 3645.75,3265 3702.75,3208 3720.28,3208 3741,3187.28 3741,3165.39 U1.78
E17: R23.2 U1.68 | length 656.7
  Top Layer w10: R23.2 3862.44,3534 3909.81,3534 3927.81,3516 3962.06,3516 4020,3458.06 4020,3105.17 4023.02,3102.15 4023.02,3085.02 3994.98,3056.98 U1.68
E18: R31.1 U1.87 | length 761.1
  Top Layer w10: v1@3286,3388 3284,3390 3284,3410 3293,3419 3293,3542.44 R31.1@3317,3566.44 ; v1@3598.84,3057 U1.87
  Bottom Layer w10: v1(3285,3391) 3285,3310.37 3531.37,3064 3554.77,3064 3565.77,3053 v1@3586,3053
  other v1: 3593,3057
E19: R32.1 U1.89 | length 756.5
  Top Layer w10: R32.1@3253,3566.44 3259,3560.44 3259,3328.14 3572.14,3015 3585.16,3015 U1.89
E20: R33.1 U1.90 | length 789
  Top Layer w10: R33.1@3187,3566.44 3243,3510.44 3243,3321.51 3565.51,2999 3573.32,2999 U1.90
E21: R34.2 U1.91 | length 807.6
  Top Layer w10: R34.2@3122,3553 3122,3532 3227,3427 3227,3314.88 3558.88,2983 3561,2983 3599.18,2944.82 U1.91
E22: R36.1 U1.92 | length 859.4
  Top Layer w10: R36.1@3057,3566.44 3064.56,3566.44 3211,3420 3211,3305 3585.1,2930.9 U1.92
E23: R39.2 U1.93 | length 906.7
  Top Layer w10: R39.2@3001,3556 3001,3554 3020,3535 3073.37,3535 3195,3413.37 3195,3293.81 U1.93
E24: R37.2 U1.94 | length 979.2
  Top Layer w10: R37.2@2932,3557 2932,3541 2954,3519 3066.75,3519 3179,3406.75 3179,3282 U1.94
E25: R41.2 U1.96 | length 1086.9
  Top Layer w10: R41.2 2863,3549 2910,3502 3061.12,3502 3143,3420.12 v1(3143,3398) ; v1(3467,2927) 3481,2913 3492,2913 3529.78,2875.22 U1.96
  Bottom Layer w10: v1@3137,3400 3169,3400 3467,3102 v1(3467,2927)
E26: R43.2 R46.2 U1.97 | length 1811.4
  Top Layer w10: v1(2581,3729) 2580,3728 2731,3728 2769,3690 2769,3595.44 R43.2 2797,3537 2806,3528 2861.37,3528 2903.37,3486 3034,3486 v1@3080.5,3439.5 ; U1.97@3515.7,2861.3 U1.97 3546.45,2831 3595,2831 v1(3617,2853)
  Bottom Layer w10: R46.2 2495.44,3758 2525,3758 2554,3729 v1(2581,3729) ; v1(3084,3434) 3086,3434 3117,3403 3117,3387.23 3134.23,3370 3171,3370 3440,3101 3440,2915 3460,2895 3577,2895 3615,2857 v1@3615,2851
E27: R30.2 R45.1 U1.76 | length 1664.3
  Top Layer w10: R30.2 R45.1@2731,3568.44 ; R45.1@2732,3567.44 2732,3537.63 2757.63,3512 2850.25,3512 2892.25,3470 2999,3470 v1@3088,3381 ; v1@3778,3223 3775,3220 3775,3187.07 U1.76
  Bottom Layer w10: v1(3090,3381) 3058,3413 3058,3444.77 3073.23,3460 3094.77,3460 3118.77,3436 3353,3436 3379,3410 3379,3294 3527,3146 3557,3146 3569,3158 3569,3201.4 3605.6,3238 3742,3238 3757,3223 v1(3776,3223)
E28: R35.1 U1.80 | length 860.5
  Top Layer w10: R35.1@3643,3567.44 3643,3516 3605,3478 3505.28,3478 3479.56,3452.28 3458.28,3452.28 3417,3411 3417,3317 3458,3276 3516.75,3276 3543.75,3249 3634.25,3249 3672,3211.25 3672,3196.88 3684.03,3184.85 3684.03,3167.25 3752.78,3098.5 U1.80
E29: R38.1 U1.81 | length 833.7
  Top Layer w10: R38.1@3578,3567.44 3578,3510 3562,3494 3498.65,3494 3472.93,3468.28 3451.66,3468.28 3401,3417.63 3401,3310.37 3451.37,3260 3510.12,3260 3537.12,3233 3627.63,3233 3656,3204.63 3656,3190.25 3668.03,3178.22 3668.03,3160.62 3695,3133.65 3695,3127.87 U1.81
E30: R40.1 U1.82 | length 761.2
  Top Layer w10: R40.1@3510,3532.44 3510,3517.02 3502.98,3510 3492.02,3510 3466.3,3484.28 3445.03,3484.28 3385,3424.25 3385,3303.75 3444.75,3244 3503.49,3244 3530.49,3217 3621,3217 3624.77,3213.23 3624.77,3213 3640,3197.77 3640,3183.63 3652.03,3171.59 3652.03,3153.99 3679,3127.02 3679,3116.03 U1.82
E31: R42.1 U1.85 | length 711.8
  Top Layer w10: v1(3349,3400) 3349,3440.37 3388.63,3480 3413.56,3480 R42.1@3446,3512.44 ; v1@3601,3123 3631,3093 3631,3081 3683.18,3028.82 U1.85
  Bottom Layer w10: v1@3350,3399 3350,3294 3521,3123 v1@3590,3123
  other v1: 3600,3124
E32: R44.1 U1.86 | length 714.1
  Top Layer w10: v1(3321,3357) 3321,3435 3387,3501 R44.1@3387,3512.44 ; v1(3564,3093) 3565,3092 3598,3092 3615,3075 3615,3074.37 3624.68,3064.69 3624.68,3059 U1.86 U1.86@3669.26,3014.74
  Bottom Layer w10: v1@3321,3359 v1(3321,3357) 3321,3297 3525,3093 v1(3564,3093)
EXT_1: J4.7 U1.2 | length 1565.4
  Top Layer w10: v1@2702,3489 2710,3497 2725,3497 2745,3477 2840,3477 2879,3438 2967.58,3438 3043,3362.58 3043,3352 v1(3056,3339) ; v1(3389,2710) 3390,2710 3412,2688 3459.5,2688 3488.04,2716.54 U1.2
  Bottom Layer w10: J4.7@2497,3507 2652,3507 2661,3498 2693,3498 v1@2702,3489 ; v1(3056,3339) 3066.5,3328.5 3107.5,3328.5 3335,3101 3335,2899.77 3348.5,2886.27 3348.5,2864.73 3333,2849.23 3333,2766 v1(3389,2710)
  other v1: 2697,3497
EXT_2: J4.6 U1.95 | length 1409.5
  Top Layer w10: J4.6@2497,3407 2647,3407 2666,3426 2666,3508 2685,3527 2720,3527 2754,3493 2846.63,3493 2885.63,3454 2980,3454 3543.99,2890.01 U1.95
EXT_3: U1.3 | length 155.5
  Top Layer w10: v1(3364,2665) 3384,2665 3391,2672 3472,2672 3502.23,2702.23 U1.3
  Bottom Layer w10: v1@3363,2666 v1(3364,2665)
GND: C1.2 C3.2 C4.1 C5.2 C6.1 C7.1 C8.1 C9.1 C10.1 C11.1 C12.2 C13.2 C16.1 C17.1 C18.2 C21.1 D1.2 D2.1 D2.2 D2.3 D3.2 J1.41 J1.43 J2.2 J2.19 J2.22 J2.24 J2.26 J2.40 J3.6 J4.1 J5.1 J6.1 J7.1 R4.1 R26.1 U1.21 U1.31 U1.44 U1.62 U1.69 U1.75 U1.84 U1.100 U2.5 U2.7 U3.2 U4.1 U4.2 U4.6 | length 1331.9
  Top Layer w8: v1@3327,2543 3336,2552 3336,2597 3349.03,2597 C17.1 ; U1.44 v1@4202.03,2593
  Top Layer w10: C12.2@2763.64,3303.73 2793,3333.09 2793,3389 v1@2802,3398 ; U2.5 U2.5@2889.74,2505.74 ; v1(2957,2690) 2966.56,2690 C4.1@3007.56,2649 ; J2.26 J2.24 J2.22@3602,3859 ; U1.100@3469.7,2824.23 U1.100 ; U1.84@3696.75,3042.25 U1.84 ; C7.1 C7.1@3944.49,2286.51 ; U1.31 4002.56,2430.56 4007.78,2430.56 4025.34,2413 v1(4026,2413) ; U1.62 U1.62@4078.66,2972.66
  Top Layer w15: v1(4170,2401) 4170,2433 C8.1@4184.51,2447.51
  Top Layer w20: J7.1 v1(2682,2678) ; C10.1@3390.51,2919.51 C10.1 ; v1(4272.03,2796) 4298,2796 4331.5,2829.5 C6.1@4331.5,2831.5
  Top Layer w30: v4(2623,3859) J2.40 ; J2.22@3605,3862 J2.22@3607,3860
  Bottom Layer w20: J4.1@2497,3192 J4.1@2497,3207
  Bottom Layer w30: J6.1 v1(4712,2502)
  other v1: 3665,2006 2677,2054 2772,2057 4061,2076 2502,2081 2933,2100 3718,2101 4784,2103 3098,2113 3781,2130 2388,2140 3203,2141 4485,2150 4582,2165 3866,2169 3059,2207 2902,2209 2699,2214 2490,2215 3218,2234 3985,2246 3887,2280 4482,2281 3675,2284 2600,2311 2377,2312 2863,2314 3041,2353 3688,2361 3835,2369 3387,2373 3166,2416 2844,2424 2930,2448 3388,2452 4493,2495 4833,2507 4581,2508 3067,2516 3337,2541 2840,2553 2875,2581 3329,2597 4202,2598 3279,2647 3164,2678 4604,2714 4839,2714 4731,2715 3041,2740 3215,2748 4289,2750 2564,2757 3938,2760 3894,2790 3138,2804 4003,2825 3359,2833 3854,2836 3322.5,2875.5 4058,2879 3913,2893 3788,2903 4014,2910 2561,2932 2387,2936 4712,2937 4598,2943 4817,2944 3959,2945 3732,2961 3844,2961 3907,3005 3792,3009 2729,3032 3849,3063 3129,3095 2392,3100 3275,3110 2562,3122 3242,3142 4192,3151 3212,3177 2833,3180 3086,3181 3521,3191 4729,3197 4608,3198 4816,3198 4197,3238 4196,3321 4198,3405 2801,3406 3325,3479 4540,3562 2538,3590 2383,3618 4472,3620 4574,3640 2828,3655 2556,3660 3656,3672 4616,3706 3607,3715 4774,3717 3655,3728 4783,3949
  other v2: 2374,2038 2386,2750 4859,3640 4858,3820 2379,3846 2521,3952
  other v3: 2828,2802 2977,2985
  other v4: 2686,3667 2635,3940
JTAG_TCK: J3.4 U1.48 | length 409.1
  Top Layer w10: U1.48 4249.83,2656.56 4264.56,2656.56 4270,2662 v1(4271,2662)
  Bottom Layer w10: v1(4271,2662) 4294.75,2662 4370.75,2738 4403,2738 4420.47,2755.47 4420.47,2830.47 J3.4
JTAG_TDI: J3.2 U1.45 | length 436
  Top Layer w10: U1.45 4196.87,2626 4210.77,2626 4248,2588.77 v1@4248,2564
  Bottom Layer w10: v1(4247,2564) 4248,2564 4284,2600 4291.77,2600 4307,2615.23 4307,2629 4384,2706 4426,2706 J3.2
JTAG_TDO: J3.3 U1.83 | length 1570
  Top Layer w10: v1(3614,3187) 3636.03,3164.97 3636.03,3147.36 3663,3120.4 3663,3105 3711.02,3056.98 U1.83 ; v1@4120,3277 4220,3277 v1(4315,3182)
  Bottom Layer w10: v1(3614,3187) 3681.23,3187 3700.23,3206 3721.77,3206 3796.77,3131 3859,3131 3938,3210 4050,3210 4116,3276 v1(4119,3276) ; v1(4315,3182) 4315,3124 4420,3019 4486,3019 4522,2983 4522,2832 J3.3
JTAG_TMS: J3.1 U1.47 | length 528.7
  Top Layer w10: U1.47 4220.55,2658 4224.02,2658 4257.02,2625 4280,2625 v1(4281,2626)
  Bottom Layer w10: v1(4281,2626) 4284.63,2626 4291,2632.37 4291,2635.63 4377.37,2722 4468,2722 4502,2688 4502,2612 J3.1
LED_B: R8.2 U1.60 | length 898.6
  Top Layer w10: U1.60 4106.82,2944.82 4145,2983 4145,2993.75 4149,2997.75 4149,3006.77 4164.23,3022 4175,3022 v1@4192,3039 ; v1(4446,3306) R8.2
  Bottom Layer w10: v1@4192,3049.77 v1(4192,3040) 4175,3023 4165.23,3023 4149,3006.77 4149,2985.23 4171.23,2963 4240.63,2963 4262,2984.37 4262,3267 4301,3306 v1(4446,3306)
LED_G: R7.2 U1.61 | length 983
  Top Layer w10: U1.61 4129,2995.32 4129,3000.37 4133,3004.37 4133,3013.4 4150,3030.4 v1(4150,3055) ; v1(4525,3301) R7.2@4525,3363.44
  Bottom Layer w10: v1(4150,3055) 4133,3038 4133,2978.6 4164.6,2947 4247.25,2947 4278,2977.75 4278,3257 4303,3282 4433.23,3282 4435.23,3280 4504,3280 v1(4525,3301)
LED_R: R6.2 U1.56 | length 962.3
  Top Layer w10: U1.56 4236.87,2964 4237.4,2964 4245.4,2972 4363,2972 4414,2921 4502,2921 4579,2998 4579,3127 4393,3313 4392,3313 4369,3336 R6.2
LEFT_PHONE: J4.4 R5.1 R28.2 U1.8 | length 1791.2
  Top Layer w10: J4.4@2485,3307 2708,3307 2708,3262 2726,3244 3060.77,3244 3085.77,3269 v1@3089.77,3269 ; R28.2@2713,3296.44 R28.2@2714,3297.44 ; R5.1@3009,3300.44 3012.44,3297 3061.77,3297 v1@3089.77,3269 ; v1(3095,3269) v1@3089.77,3269 ; v1(3480,2566) 3482,2564 3502.81,2564 U1.8
  Bottom Layer w10: v1@3095,3261 v1(3095,3269) 3184,3180 3184,3148 3272,3060 3272,2720.23 3353.23,2639 3353.63,2639 3426.63,2566 v1(3480,2566)
NetC1_1: C1.1 C4.2 L1.1 U2.10 | length 744.5
  Top Layer w10: U2.10 2811,2685 2823,2697 2904.44,2697 2948.44,2653 2948.44,2640.56 2977,2612 L1.1@3089,2612
  Top Layer w20: L1.1@3089,2612 3128,2573 3217.69,2573 3252,2538.69 3252,2536.9 3264,2524.9 3264,2393 C1.1@3232,2361
NetC3_1: C3.1 U2.3 | length 184.4
  Top Layer w10: U2.3@2851,2482.63 U2.3 2850.37,2526.37 2879,2555 2885.77,2555 2886.77,2556 2940.44,2556 C3.1
NetC12_1: C12.1 C19.2 R28.1 | length 1190.7
  Top Layer w10: v1(2678,2460) 2701,2483 2701,2511.56 C19.2@2704.44,2515 ; R28.1@2714,3355.56 C12.1@2761,3355.56 ; v1@2744,3404 2761,3387 C12.1@2761,3355.56 ; C12.1@2762,3355.56 C12.1@2761,3355.56
  Bottom Layer w10: v1(2678,2460) 2727,2509 2727,2753.91 2800,2826.91 2800,3354 2750,3404 v1@2744,3404
  other v1: 2752,3406
NetC13_1: C13.1 C20.2 R29.2 | length 1214
  Top Layer w10: v1(2686,2628) 2686,2625 2703,2608 2703,2578.44 C20.2@2705.44,2576 ; v1(2708,3426) 2726,3444 2806,3444 R29.2@2881.62,3368.38 ; C13.1@2836,3354.56 R29.2@2901,3354.56
  Bottom Layer w10: v1(2686,2628) 2687,2628 2711,2652 2711,2760.54 2784,2833.54 2784,3347.37 2751.37,3380 2741.23,3380 2726,3395.23 2726,3408 v1(2708,3426)
NetC14_1: C14.1 R3.2 U2.1 | length 1136.9
  Top Layer w10: 2478,2858 2478,2734 2351,2607 2351,2425 2432,2344 2635,2344 2773,2482 U2.1 R3.2@2811,2381.44
NetC14_2: C14.2 J4.5 | length 751.1
  Top Layer w10: C14.2@2471,3007 2537,3073 2534,3073 v1(2537,3076)
  Bottom Layer w10: J4.5@2497,3407 2608,3407 2728,3287 2728,3131 2675,3078 2539,3078 v1(2537,3076)
NetC15_1: C15.1 R4.2 U2.9 | length 1728.6
  Top Layer w10: C15.1@2510,3848 2514,3848 2561,3801 v1(2562,3801) ; 2614,3029 v1(2633,3029) ; R4.2@2642,3101 2628,3101 2612,3085 2612,2819 2768,2663 2768,2636 2792,2612 2814,2612 U2.9@2830,2628
  Bottom Layer w10: v1(2562,3801) 2609,3754 2609,3629 2723,3515 2723,3482 2712,3471 2672,3471 2646,3445 2646,3392 2744,3294 2744,3091 2682,3029 v1(2633,3029)
NetC15_2: C15.2 J4.8 | length 228
  Top Layer w10: C15.2 2484,3729.88 J4.8@2484,3509
NetC19_1: C19.1 U2.2 | length 119.4
  Top Layer w10: C19.1@2759.56,2515 2778.56,2534 2810.88,2534 2830.68,2514.2 U2.2
NetC20_1: C20.1 U2.8 | length 153.1
  Top Layer w10: C20.1@2760.56,2576 2764.56,2580 2828,2580 2850,2602 U2.8@2850,2654.86
NetD1_1: D1.1 R30.1 | length 611.6
  Top Layer w10: D1.1@2455.5,3941 2459,3944.5 2488.5,3944.5 2588,3845 2588,3775 2543.15,3730.15 2543.15,3698.83 2536.71,3692.39 2514.39,3692.39 2503,3681 2503,3643 2523,3623 R30.1 R30.1@2664,3630
NetD2_4: D2.4 J5.4 R8.1 | length 801.1
  Top Layer w8: v1(4612,3660) 4668,3716 4668,3920 4699,3951 D2.4
  Top Layer w10: R8.1@4446,3421.56 v1@4486.22,3461.78 ; v1@4488.44,3464 4569.12,3464 J5.4@4611.12,3422
  Bottom Layer w8: v1(4486,3462) 4612,3588 v1(4612,3660)
NetD2_5: D2.5 J5.6 R7.1 | length 870.3
  Top Layer w8: v1(4670,3624) 4683,3637 4683,3900 4698.57,3915.57 D2.5
  Top Layer w10: R7.1@4525,3418.56 4529.56,3414 4529.56,3413.44 4621,3322 J5.6@4732,3322
  Bottom Layer w8: v1(4568,3374) 4586,3392 4586,3540 v1(4670,3624)
NetD2_6: D2.6 J5.2 R6.1 | length 766.8
  Top Layer w8: J5.2@4725.87,3517.13 D2.6
  Top Layer w10: R6.1@4369,3423.56 4450.44,3505 4715,3505 J5.2@4732,3522
NetD3_1: D3.1 R46.1 | length 180.2
  Bottom Layer w10: D3.1@2382.5,3948 2382.5,3945.5 2494,3834 R46.1
NetJ1_44: J1.44 J1.46 | length 254.6
  Top Layer w10: J1.46@2622,1977 2627,1977 2650,2000 2700,2000 2722,1978 J1.44
NetJ1_49: J1.49 R3.1 R26.2 | length 749.6
  Top Layer w10: v1@2422,2087 2552,2217 2591,2217 2686,2312 R26.2 ; R26.2@2751.44,2313 R3.1@2751.44,2377
  Bottom Layer w10: J1.49 v1@2422,2089
  other v1: 2424,2087
NetJ2_1: J2.1 R9.2 | length 308.2
  Top Layer w10: R9.2 4361,3649 4380,3668 v1(4458,3668)
  Bottom Layer w10: v1(4458,3668) 4490,3700 4560,3700 J2.1@4605,3745
NetJ2_3: J2.3 R11.2 | length 814.7
  Top Layer w10: R11.2 v1(3971,3451)
  Bottom Layer w10: v1@3971,3452 3971,3483 4008,3520 4041,3520 4212,3691 4422,3691 4502,3771 J2.3@4502,3847
NetJ2_4: J2.4 R10.1 | length 363.6
  Top Layer w10: R10.1@4294,3634 4378,3718 4488,3718 4502,3732 J2.4@4502,3847
NetJ2_5: J2.5 R13.2 | length 795.1
  Top Layer w10: R13.2 v1(3906,3451) v1@3907,3452
  Bottom Layer w10: v1@3905,3452 3905,3495 3930.23,3520.23 3932.23,3520.23 3948,3536 4034.37,3536 4205.37,3707 4353,3707 4400,3754 J2.5@4400,3845
NetJ2_6: J2.6 R12.1 | length 233.2
  Top Layer w10: R12.1@4230,3626.56 4323.44,3720 4357.37,3720 4404.37,3767 J2.6@4405,3767
NetJ2_7: J2.7 R15.2 | length 738.6
  Top Layer w10: v1@3840,3451 v1(3841,3452) R15.2
  Bottom Layer w10: v1@3840,3453 3842,3453 3889,3500 3889,3501.63 3939.37,3552 4027.75,3552 4198.75,3723 4275,3723 4299,3747 J2.7@4299,3844
NetJ2_8: J2.8 R14.1 | length 195.2
  Top Layer w10: R14.1@4164,3621 J2.8@4302,3759
NetJ2_9: J2.9 R18.2 | length 724
  Top Layer w10: R18.2@3776,3393.56 v1(3776,3452)
  Bottom Layer w10: v1(3776,3452) 3776,3453 3789,3466 3810.51,3466 3913.51,3569 4022.12,3569 4192.12,3739 4195,3739 4205,3749 J2.9@4205,3862
NetJ2_10: J2.10 R16.1 | length 262.7
  Top Layer w10: R16.1@4100,3626.56 4202,3728.56 J2.10@4202,3847
NetJ2_11: J2.11 R20.2 | length 748.4
  Top Layer w10: R20.2@3691,3390.56 v1(3691,3449)
  Bottom Layer w10: v1(3691,3449) 3691,3450.12 3707.88,3467 3742.88,3467 3757.88,3482 3802,3482 3852.75,3532.75 3853,3532.75 3912.25,3592 4013,3592 4105,3684 J2.11@4105,3862
NetJ2_12: J2.12 R17.1 | length 266.5
  Top Layer w10: R17.1@4030,3626.56 4030,3643 4105,3718 J2.12@4105,3862
NetJ2_13: J2.13 R22.2 | length 728.8
  Top Layer w10: R22.2@3629,3391.56 v1(3629,3449)
  Bottom Layer w10: v1@3631,3451 3663,3483 3736.25,3483 3751.25,3498 3795.37,3498 3846.12,3548.75 3846.37,3548.75 3906.63,3609 3969,3609 4005,3645 J2.13@4005,3862
NetJ2_14: J2.14 R19.1 | length 238.3
  Top Layer w10: R19.1@3959,3626.56 3959,3663 4002,3706 J2.14@4002,3847
NetJ2_15: J2.15 R24.2 | length 706.2
  Top Layer w10: R24.2 3517,3398 v1(3571,3452)
  Bottom Layer w10: v1@3573.5,3454.5 3568.5,3454.5 3581,3467 3609.54,3467 3641.54,3499 3729.63,3499 3744.63,3514 3788.75,3514 3839.49,3564.75 3839.75,3564.75 3903,3628 J2.15@3903,3846
NetJ2_16: J2.16 R21.1 | length 209
  Top Layer w10: R21.1@3894,3630 J2.16@3894,3839
NetJ2_17: J2.17 R25.2 | length 700.4
  Top Layer w10: R25.2 3457,3404 3503,3450 v1(3525,3450)
  Bottom Layer w10: v1(3525,3450) 3527,3450 3560,3483 3602.91,3483 3634.91,3515 3723,3515 3805,3597 J2.17@3805,3862
NetJ2_18: J2.18 R23.1 | length 206
  Top Layer w10: J2.18@3808,3825 3808,3689 3825,3672 R23.1
NetJ2_21: J2.21 R31.2 | length 444.2
  Top Layer w10: R31.2 3363.44,3668 3450,3668 v1(3500,3718)
  Bottom Layer w10: v1(3500,3718) 3513,3731 3573,3731 3605,3763 J2.21@3605,3862
NetJ2_23: J2.23 R32.2 | length 408.4
  Top Layer w10: R32.2 3317.44,3686 3396,3686 v1(3427,3717)
  Bottom Layer w10: v1(3427,3717) 3457,3717 3505,3765 J2.23@3505,3862
NetJ2_25: J2.25 R33.2 | length 374.1
  Top Layer w10: R33.2@3188,3631 R33.2 3198.56,3621.56 3295,3718 v1(3343,3718)
  Bottom Layer w10: v1(3343,3718) 3405,3780 J2.25@3405,3862
NetJ2_27: J2.27 R35.2 | length 525.4
  Top Layer w10: v1@3557,3694 3628.44,3622.56 R35.2
  Bottom Layer w10: J2.27@3305,3862 3317,3850 3317,3707.23 3334.23,3690 3513,3690 3520,3697 v1(3557,3697)
NetJ2_28: J2.28 R34.1 | length 359.7
  Top Layer w10: R34.1@3122,3622 3122,3649 3165,3692 3240,3692 3305,3757 J2.28@3305,3862
NetJ2_29: J2.29 R36.2 | length 228.8
  Top Layer w10: R36.2 3058,3657 3109,3708 3144,3708 v1(3159,3723)
  Bottom Layer w10: v1(3159,3723) J2.29@3205,3769
NetJ2_31: J2.31 R38.2 | length 643.5
  Top Layer w10: v1(3527,3664) 3562,3664 3578,3648 R38.2
  Bottom Layer w10: J2.31@3103,3860 3103,3735 3165,3673 3512.77,3673
NetJ2_32: J2.32 R39.1 | length 285.8
  Top Layer w10: R39.1@2993,3622.56 2993,3651 3105,3763 J2.32@3105,3862
NetJ2_33: J2.33 R40.2 | length 692
  Top Layer w10: v1@3483,3638 3496,3638 3513,3621 R40.2@3513,3603.56
  Bottom Layer w10: J2.33@3005,3862 3005,3749 3097,3657 3466,3657 v1(3484,3639)
NetJ2_34: J2.34 R37.1 | length 271.3
  Top Layer w10: R37.1@2928,3622.56 2928,3651 3005,3728 J2.34@3005,3862
NetJ2_35: J2.35 R42.2 | length 752.7
  Top Layer w10: R42.2@3445,3568 v1(3445,3616)
  Bottom Layer w10: J2.35@2905,3862 2905,3745 3009,3641 3427,3641 v1@3443,3625
NetJ2_36: J2.36 R41.1 | length 256.8
  Top Layer w10: R41.1@2863,3622.56 2863,3656 2905,3698 J2.36@2905,3862
NetJ2_37: J2.37 R44.2 | length 784
  Top Layer w10: R44.2@3385,3569.56 v1(3385,3615)
  Bottom Layer w10: J2.37@2805,3862 2805,3766 2956,3615 v1(3385,3615)
NetJ2_38: J2.38 R43.1 | length 243.3
  Top Layer w10: R43.1 2797,3686 2805,3694 J2.38@2805,3862
NetJ2_39: J2.39 R45.2 | length 248.2
  Top Layer w10: R45.2 v1@2732,3664
  Bottom Layer w10: J2.39@2705,3862 J2.39 2705,3716 2731,3690 v1(2731,3666)
NetR1_2: R1.2 U2.4 | length 304.8
  Top Layer w10: U2.4 2870.05,2514.05 2880,2524 2917,2524 2973,2468 R1.2
NetR2_2: R2.2 U2.6 | length 281.8
  Top Layer w10: U2.6 2890,2654.97 2890,2620 2914,2596 3031,2596 3094,2533 R2.2@3100.44,2533
NetU1_23: U1.23 U4.4 | length 462.2
  Top Layer w8: U4.4 3918,2203 v1(3934,2219)
  Top Layer w10: v1(3715,2320) 3715,2358.61 U1.23 U1.23@3780.23,2424.23
  Bottom Layer w10: v1@3714,2319 3716,2321 3763,2321 3867,2217 3932,2217 v1(3934,2219)
RIGHT_PHONE: J4.2 R27.2 R29.1 U1.9 | length 1919.9
  Top Layer w8: v1(3443,2534) 3445,2532 3498.64,2532 U1.9
  Top Layer w10: J4.2@2497,3207 2629,3207 2649.3,3227.3 3114.7,3227.3 3135,3207 v1(3135,3186) ; R29.1@2902,3298.44 R29.1@2902.56,3299 ; R29.1@2903,3299.44 2946.56,3299.44 2975,3271 v1(3051,3271)
  Bottom Layer w10: v1(3051,3271) 3051,3270 v1(3135,3186) 3163,3158 3163,3140 3256,3047 3256,2713.37 3346.37,2623 3346.77,2623 3362,2607.77 3362.23,2607.77 3422,2548 3429,2548 v1(3443,2534)
SOUND_CLK: R1.1 U1.79 | length 1585.5
  Top Layer w10: R1.1@3170,2463 v1(3220,2413) v1@3214,2407 ; v1(3711,3180) 3709,3180 3708,3181 3711,3181 3725,3167 3725,3153 3766.15,3111.85 U1.79
  Bottom Layer w10: v1(3220,2413) 3501,2413 3547.73,2459.73 3547.73,2480.73 3986,2919 3986,2981 3855,3112 3779,3112 v1(3711,3180)
SOUND_IPDOWN: R2.1 U1.10 | length 478.4
  Top Layer w10: R2.1@3185,2530 3196,2530 3220,2506 v1@3220,2492 ; v1(3389,2492) 3390,2491 3438.23,2491 3444.73,2497.5 3492.5,2497.5 3492.5,2498.02 U1.10@3590.65,2596.16
  Bottom Layer w10: v1(3220,2481) 3242,2481 3253,2492 v1(3389,2492)
pads on no net: J1.48 J1.50 J2.30 J5.3 J5.5

## Polygon pours and split planes (outlines as drawn)
GND on Bottom Layer "Top Layer-No Net 1" (solid, pour order 17): 2346,1940 4877,1940 4877,3972 4875,3974 4644.22,3974.32 4644.22,3764 2680,3764 2680,3974 2348,3974 2346,3972
GND on Bottom Layer "Top Layer-No Net" (solid, shelved, pour order 15): 2337,3160 2338,3161 2911,3161
+3V3 on Top Layer "Top Layer-No Net" (solid, pour order 14): 3524,2824.33 3525,2720 3870,2375 4205,2710 4220,2785 4105,2900 3930,2725 3677.66,2980
GND on Top Layer "Top Layer-No Net" (solid, pour order 16): 4191.57,2788.28 4278.29,2875 4287,2875 4287,2872 4374,2785 4362,2773 4362,2670 4339,2670 4319,2650 4184,2785 4184,2789
GND on Top Layer "Top Layer-No Net" (solid, pour order 18): 4125,2902.49 4119.47,2902.49 3932.54,2713 3678,2971.02 3678,2979.75 3678,3032.08 3839.71,3196
GND on Top Layer "Top Layer-No Net" (solid, pour order 11): 3724,3301.07 3724.93,3300.13 3724.93,3070.09 3963.39,3070.09 3965.27,3071.98 3983,3089.83 3983,3309
GND on Top Layer "Top Layer-No Net 1" (solid, shelved, pour order 19): 3383,3964 3383,3753 3608,3753 3608,3964
GND on Top Layer "Top Layer-No Net 1" (solid, pour order 20): 4877,3972 4875,3974 4626,3974 4627,3751 4576,3751 4575.77,3705 4102.18,3705 4101,2465 3372,2465 3371,1940 4874,1940 4877,1943
GND on Top Layer "Top Layer-No Net" (solid, pour order 12): 2346,1940 3456,1941 3493.64,2767.04 3847,3117 4100,3284 4101,3757 2675,3759 2675,3972 2672,3974 2348,3974 2346,3972

## Keep-outs
Keep-Out Layer:
  the board outline again, w3

## Other copper
Top Layer:
  rectangle net GND: 3570,3721 3640,3763

## Silkscreen, mask and mechanical layers (free items; w line width, h text height)
Top Overlay:
  text "MSX fat breakout board" at 2932,3672 h40
  text "V 0.4" at 3825,3672 h40
  text "G" at 4139,2145 h393.7
Bottom Overlay:
  text "*" at 4575,3061 h40
Mechanical 1:
  text "Licensed under the Creative Commons Attribution-Share Alike 3.0 United States license" at 2432,4487 h40
  text "http://creativecommons.org/licenses/by-sa/3.0/us/" at 2429,4426 h40